# Altium PCB Portable power supply version2.PcbDoc
Units mm, origin at the board's own origin, x right, y up, seen from the top; angles counter-clockwise.
Board outline 83.82 x 73.66 mm, 4 copper layers (Top Layer, GND, PWR, Bottom Layer), stack 0.603 mm thick; 87 components, 84 nets, 337 pads, 153 vias.
Unrouted connection lines stored in the file: 2.
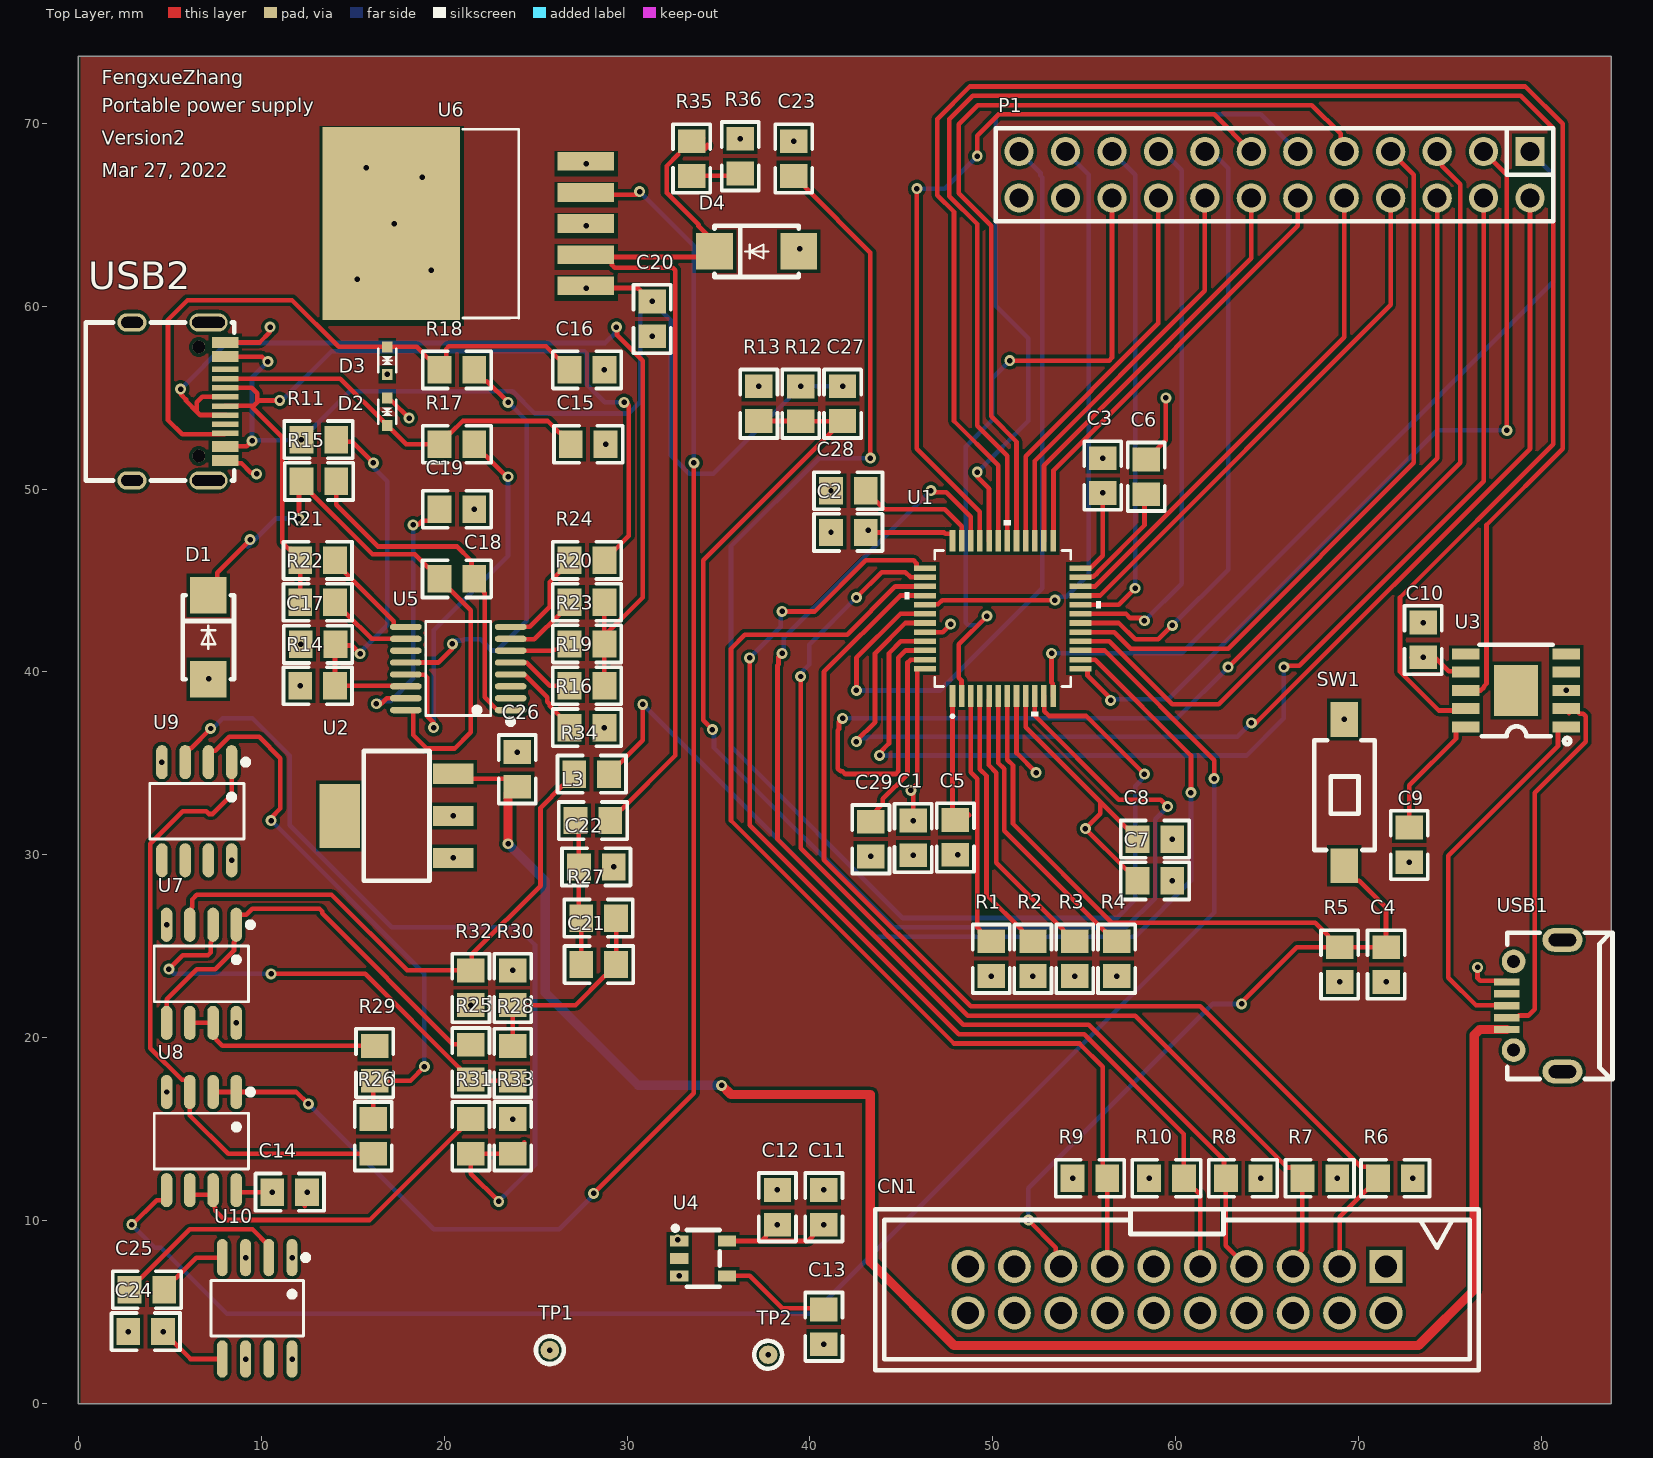
[diagram p0: Top Layer view]
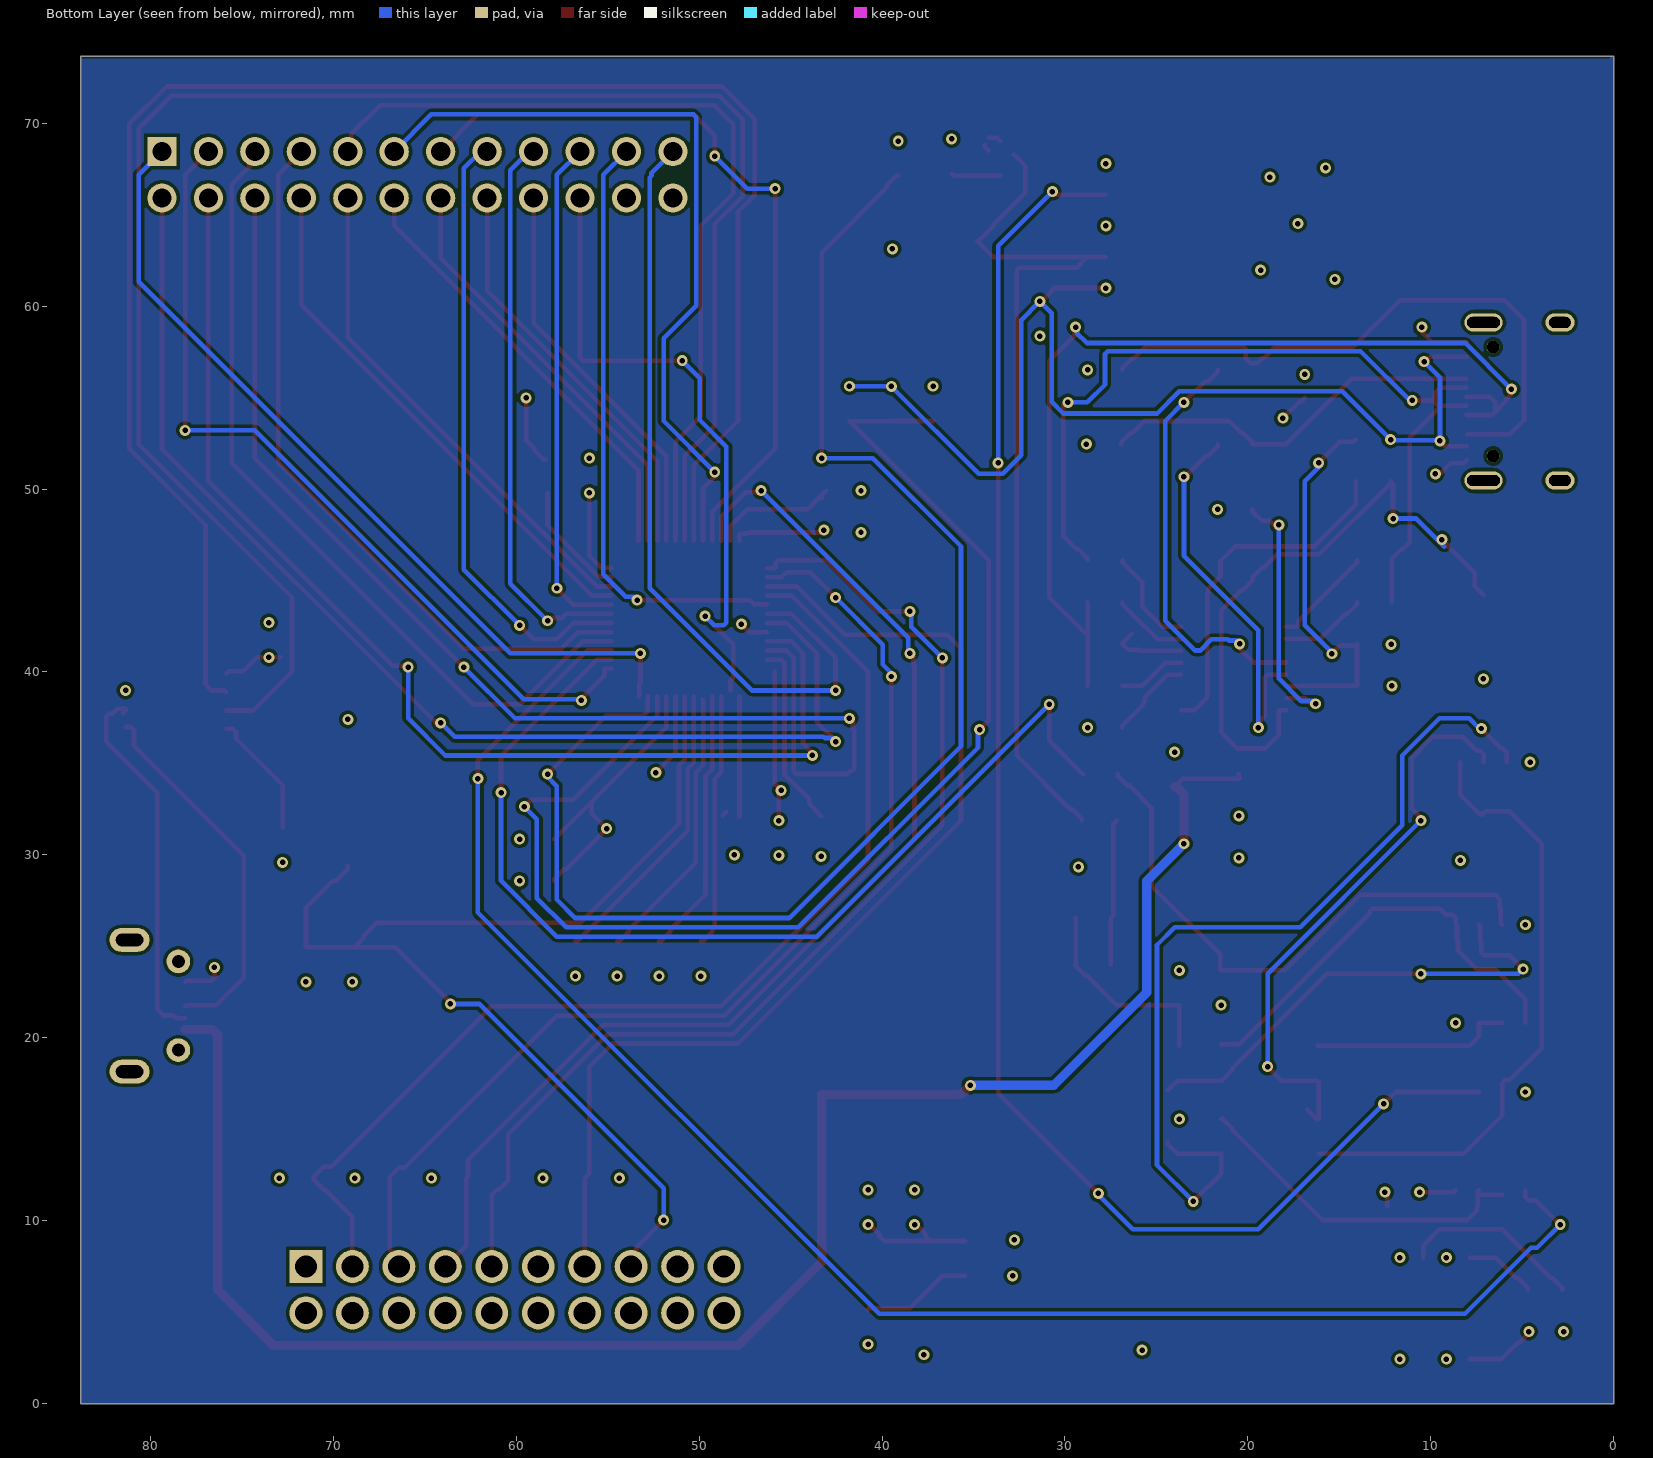
[diagram p1: Bottom Layer view, seen from below]
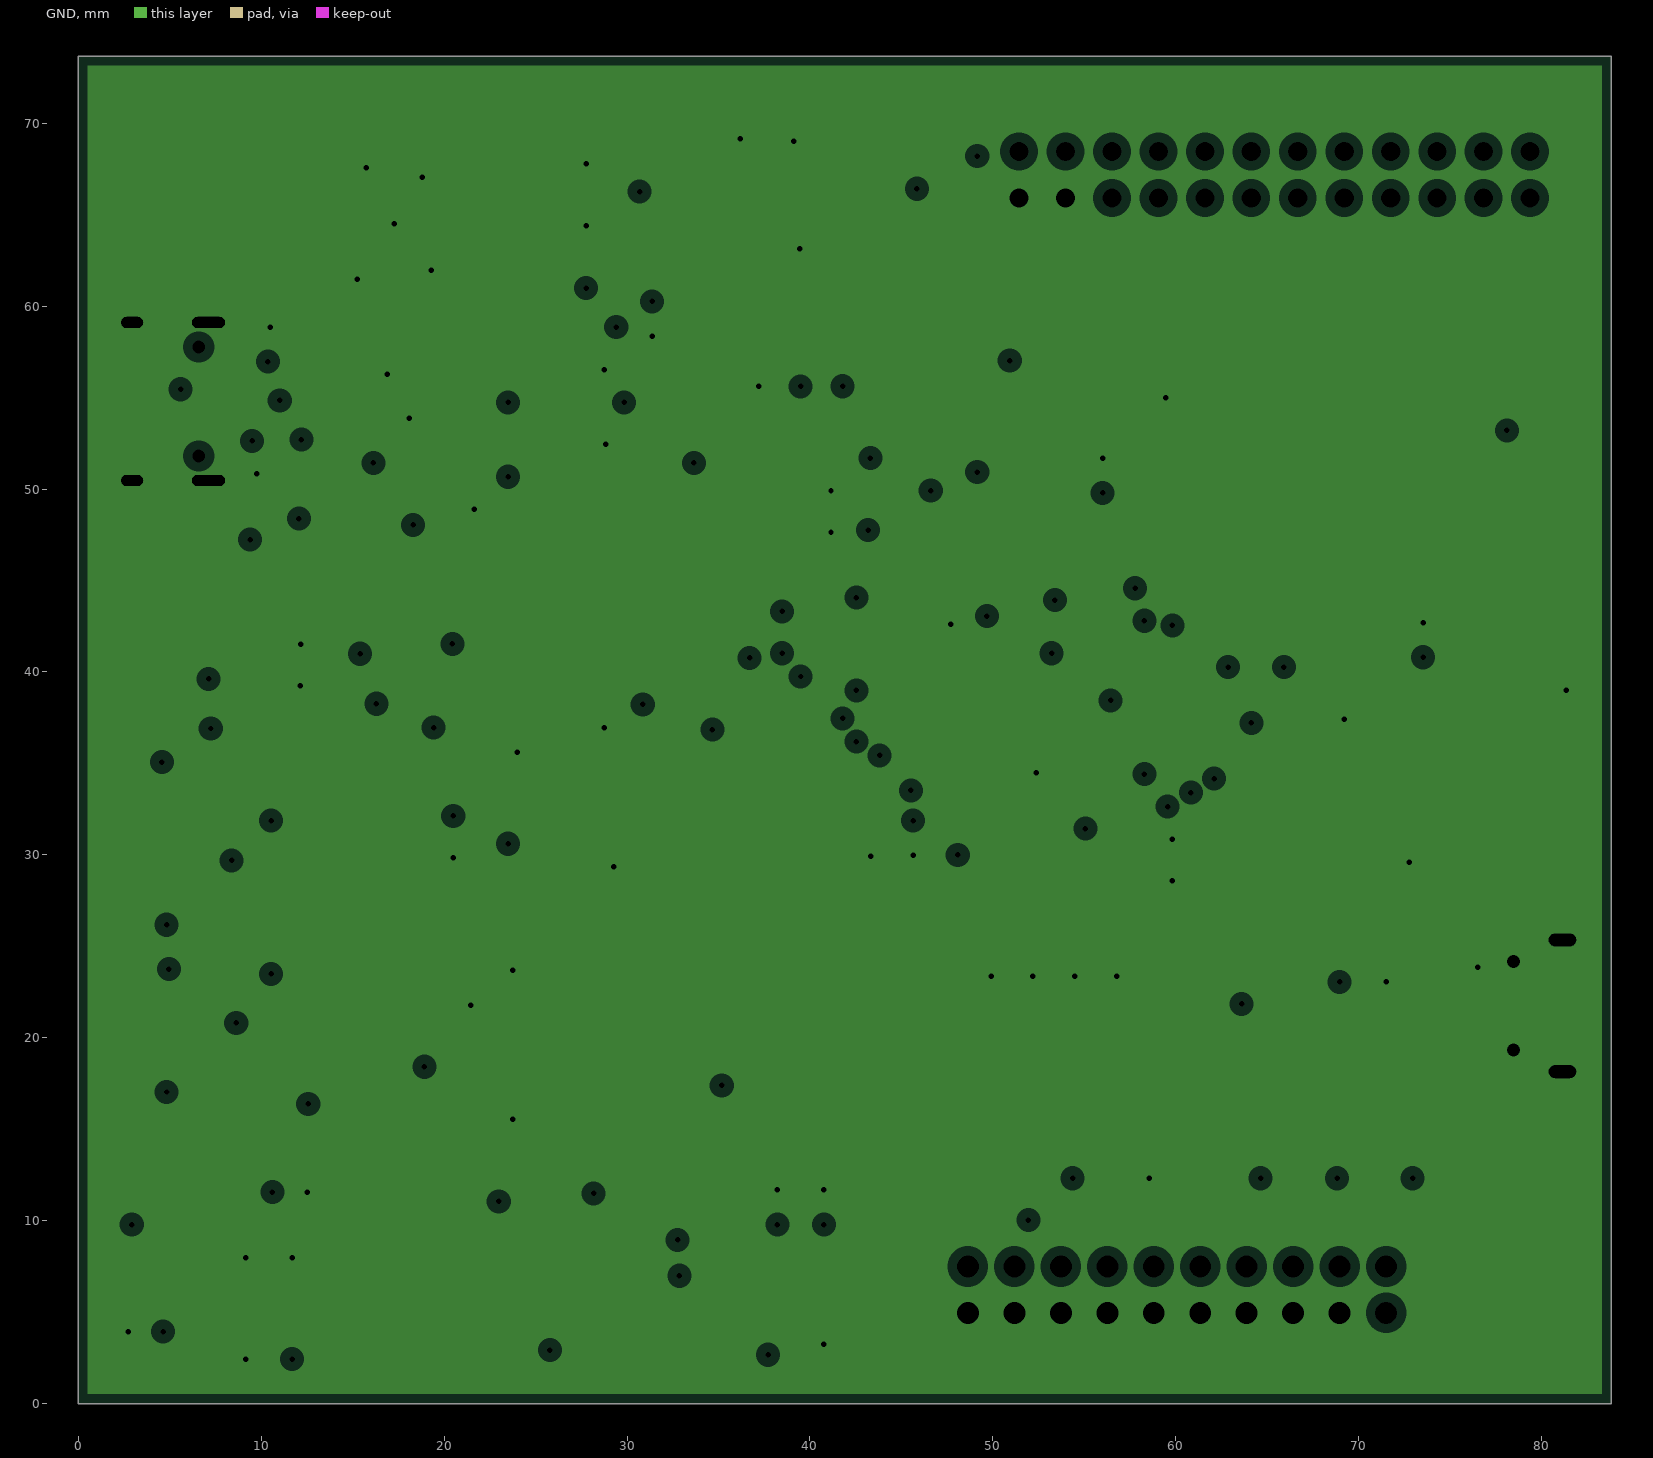
[diagram p2: GND, clearances drawn from the general rule]
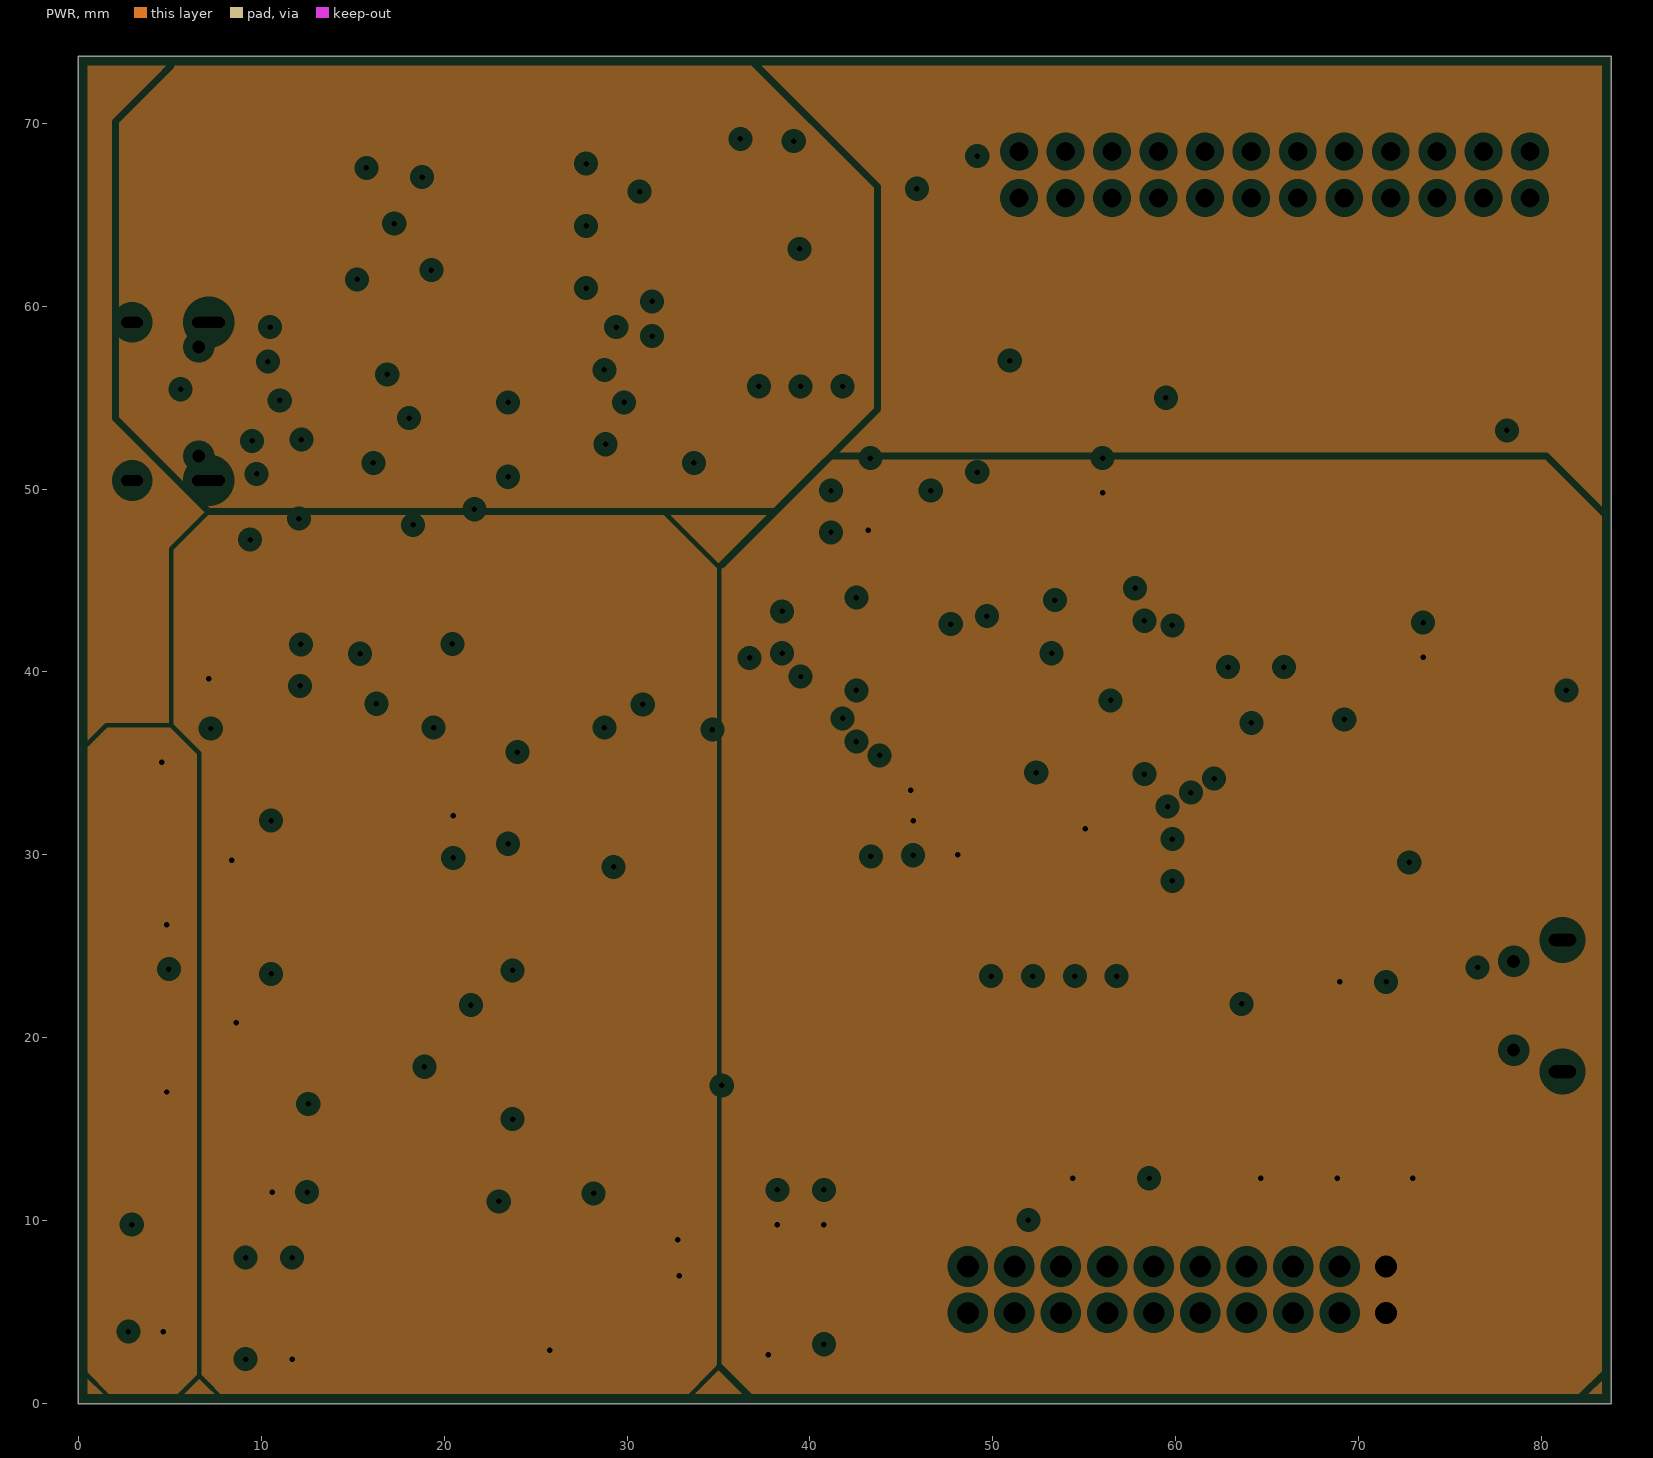
[diagram p3: PWR, clearances drawn from the general rule]
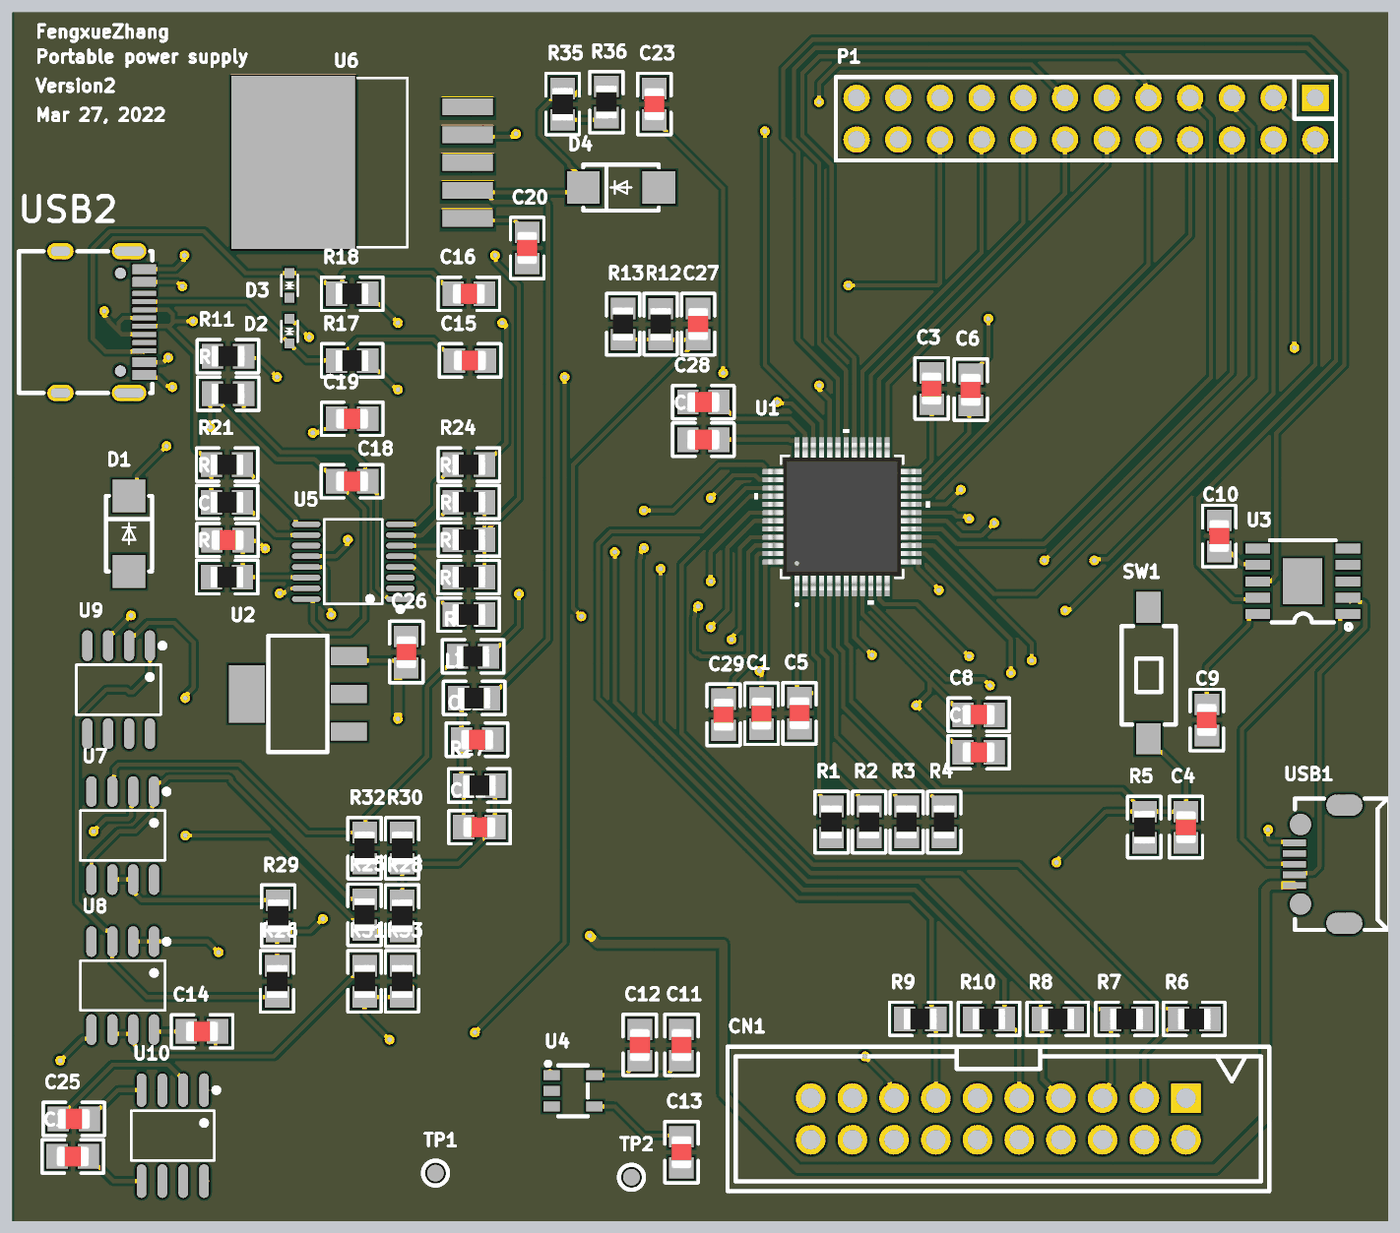
[diagram p4: 3D render of the assembled board from above, using the file's embedded part models]

## Layer stack, top to bottom
Top Solder: solder mask 0.0102, Solder Resist, Dk 3.5
Top Layer: signal copper 0.0356
Dielectric 2: core 0.0711, FR-4, Dk 4.1
GND: plane copper 0.035, net GND
Dielectric 1: prepreg 0.32, FR-4, Dk 4.8
PWR: plane copper 0.035, net (Multiple Nets)
Dielectric 3: core 0.0711, FR-4, Dk 4.1
Bottom Layer: signal copper 0.0356
Bottom Solder: solder mask 0.0102, Solder Resist, Dk 3.5

## Board outline
0,0 0,73.66 83.82,73.66 83.82,0

## Design rules (kind name [scope] priority, off if disabled: settings)
Clearance [All] p1: gap=0.178 ignorepadtopadclearanceinfootprint=FALSE
PlaneClearance [All] p1: clearance=0.508
PlaneConnect [All] p1: planeconnectstyle=Relief reliefexpansion=0.508 reliefentries=4 reliefconductorwidth=0.254 reliefairgap=0.254
PolygonConnect [All] p1: connectstyle=Relief reliefconductorwidth=0.254 reliefentries=4 polygonreliefangle="90 Angle" airgapwidth=0.254
RoutingVias [All] p1: holewidth=0.3 width=0.6 viastyle="Through Hole" minholewidth=0.3 minwidth=0.6 maxholewidth=0.711 maxwidth=1.27
SolderMaskExpansion [All] p1: expansion=0.102 istentingtop=FALSE
Width Width_power [InNet('VBUSmin')] p1: maxlimit=0.508 minlimit=0.254 preferedwidth=0.508
Width [All] p2: maxlimit=0.254 minlimit=0.254 preferedwidth=0.254
28 further rules are at their usual default settings.

## Classes and differential pairs
component class VoltageRegulator: C20 C21 C22 C23 C24 C25 D4 L3 R25 R26 R27 R28 R29 R30 R31 R32 R33 R34 R35 R36 U6 U7 U8 U9 U10
component class Front(LDR): C15 C16 C17 C18 C19 C27 D1 D2 D3 R11 R12 R13 R14 R15 R16 R17 R18 R19 R20 R21 R22 R23 R24 U5 USB2
component class Control: C1 C2 C3 C4 C5 C6 C7 C8 C9 C10 C11 C12 C13 C14 C26 C28 C29 CN1 P1 R1 R2 R3 R4 R5 R6 R7 R8 R9 R10 SW1 TP1 TP2 U1 U2 U3 U4 USB1

## Components (designator, comment, footprint, x,y, rotation, side; value= is the part's Value field where it differs from the comment)
C1 "0.1uF" 0805C 45.644,30.927 r270 top
C2 "0.1uF" 0805C 42.103,47.625 r180 top
C3 "0.1uF" 0805C 56.007,50.739 r90 top
C4 "100nF" 0805C 71.501,24.003 r90 top
C5 "0.1uF" 0805C 47.955,30.952 r270 top
C6 "2.2nF" 0805C 58.395,50.663 r90 top
C7 "0.1uF" 0805C 58.867,28.575 r0 top
C8 "0.1uF" 0805C 58.867,30.861 r0 top
C9 "0.1uF" 0805C 72.771,30.541 r270 top
C10 "0.1uF" 0805C 73.528,41.752 r270 top
C11 "0.1uF" 0805C 40.767,10.729 r90 top
C12 "10uF" 0805C 38.227,10.729 r90 top
C13 "10nF" 0805C 40.767,4.191 r90 top
C14 "10uF" 0805C 11.557,11.557 r0 top
C15 "220pF" 0805C 27.879,52.451 r0 top
C16 "220pF" 0805C 27.813,56.515 r0 top
C17 "0.1uF" 0805C 13.117,41.504 r180 top
C18 "10uF" 0805C 20.701,45.085 r180 top
C19 "1nF" 0805C 20.701,48.895 r0 top
C20 "330uF" 0805C 31.369,59.309 r270 top
C21 "5.6nF" 0805C 28.453,24.003 r0 top
C22 "680uF" 0805C 28.321,29.337 r180 top
C23 "0.1uF" 0805C 39.116,68.072 r90 top
C24 "10uF" 0805C 3.683,3.937 r0 top
C25 "10uF" 0805C 3.749,6.223 r0 top
C26 "10uF" 0805C 24.003,34.671 r90 top
C27 "5.6nF" 0805C 41.783,54.671 r270 top
C28 "2.2nF" 0805C 42.103,49.911 r180 top
C29 "2.2nF" 0805C 43.332,30.861 r270 top
CN1 "300S-20P" CONN-TH_300S-20P 60.071,6.223 r180 top
D1 "SS34_C8678" DO-214AC_L4.3-W2.7-LS5.3-RD 7.112,41.896 r270 top
D2 "PESD3V3S1BA-N" SOD-523_L1.2-W0.8-LS1.6-BI 16.891,54.229 r270 top
D3 "PESD3V3S1BA-N" SOD-523_L1.2-W0.8-LS1.6-BI 16.891,57.023 r90 top
D4 "SS34_C8678" DO-214AC_L4.3-W2.7-LS5.3-RD 37.084,62.992 r0 top
L3 "33uA" 0805 28.133,31.877 r0 top
P1 "Female header2*12PRight Angle/pitch2.54mm" HDR-TH_24P-P2.54-V-F-R2-C12-S2.54 65.405,67.183 r180 top
R1 "10K" 0805 49.911,24.323 r270 top
R2 "10K" 0805 52.197,24.323 r270 top
R3 "10K" 0805 54.483,24.323 r270 top
R4 "10K" 0805 56.769,24.323 r270 top
R5 "10K" 0805 68.961,24.003 r90 top
R6 "10K" 0805 72.009,12.319 r180 top
R7 "10K" 0805 67.879,12.319 r180 top
R8 "10K" 0805 63.693,12.319 r180 top
R9 "10K" 0805 55.311,12.319 r0 top
R10 "10K" 0805 59.497,12.319 r0 top
R11 "47k" 0805 13.147,52.705 r180 top
R12 "5.1K" 0805 39.497,54.658 r90 top
R13 "1K" 0805 37.211,54.671 r270 top
R14 "4.7k" 0805 13.081,39.243 r0 top
R15 "10K" 0805 13.147,50.419 r0 top
R16 "10K" 0805 27.813,36.957 r180 top
R17 "100" 0805 20.701,52.451 r0 top
R18 "100" 0805 20.701,56.515 r0 top
R19 "1K" 0805 27.813,39.243 r180 top
R20 "13K" 0805 27.813,43.815 r180 top
R21 "13K" 0805 13.081,46.101 r0 top
R22 "1K" 0805 13.081,43.815 r0 top
R23 "2k" 0805 27.813,41.529 r0 top
R24 "2k" 0805 27.813,46.101 r0 top
R25 "1K" 0805 21.463,18.669 r270 top
R26 "2k" 0805 16.129,14.605 r90 top
R27 "12k" 0805 28.453,26.543 r180 top
R28 "1K" 0805 23.749,18.603 r90 top
R29 "2k" 0805 16.198,18.603 r90 top
R30 "2k" 0805 23.749,22.733 r270 top
R31 "5.1K" 0805 21.463,14.605 r90 top
R32 "5.1K" 0805 21.463,22.733 r270 top
R33 "5.1K" 0805 23.749,14.605 r90 top
R34 "5.1K" 0805 28.067,34.417 r0 top
R35 "47k" 0805 33.528,68.072 r90 top
R36 "4.7k" 0805 36.195,68.199 r270 top
SW1 "TS-1101-C-W" SW-SMD_L6.0-W3.3-LS8.0 69.215,33.401 r90 top
TP1 "INPUT" Testpoin 25.781,2.921 r0 top value=Input
TP2 "INPUT" Testpoin 37.719,2.667 r90 top value=Input
U1 "STM32F334C6T6" LQFP48-7x7mm 50.546,42.926 r90 top
U2 "AMS1117-5.0_C347223" SOT-223_L6.7-W3.5-P2.30-BR 17.399,32.131 r0 top
U3 "CH340K" ESOP-10_L4.9-W3.9-P1.00-LS6.2-BL-EP 78.613,38.989 r90 top
U4 "LP2992IM5-3.3/NOPB" SOT-23-5_L3.0-W1.7-P0.95-LS2.8-BR 34.163,7.935 r180 top
U5 "LDR6321" SSOP-16_L5.0-W4.4-P0.65-LS6.4-BL 23.639,37.913 r90 top
U6 "LM2596S-ADJ" TO-263-5_L10.2-W8.9-P1.70-BR 22.428,64.516 r0 top
U7 "LMV358-SR" SOP-8_L4.9-W3.9-P1.27-LS6.0-BL 6.731,23.495 r180 top
U8 "LMV358-SR" SOP-8_L4.9-W3.9-P1.27-LS6.0-BL 6.731,14.351 r180 top
U9 "LMV358-SR" SOP-8_L4.9-W3.9-P1.27-LS6.0-BL 6.477,32.385 r180 top
U10 "TP7660H_C2833525" SOIC-8_L4.9-W3.9-P1.27-LS6.0-BL 9.779,5.207 r180 top
USB1 "MICROXNJ" MICRO-USB-SMD_MICROXNJ 79.626,21.747 r90 top
USB2 "TYPEC-304-BCP16" USB-C-SMD_TYPEC-304-BCP16 5.486,54.788 r270 top

## Footprints (in the part's own frame and the unit in brackets; to place one, negate y for a bottom-side part, rotate by r counter-clockwise, add the part's x,y. Pads: shape width x height; smd on the part's side, far side on the other; paste and mask are expansions set on the pad)
0805 [mm]
  rect 1.3x1.5 smd: 1(-0.95,0) 2(0.95,0)
  silkscreen extent -1.87,-1.02 1.88,1.02, body extent -1,-0.63 1,0.62, height 0.5
0805C [mm]
  rect 1.3x1.5 smd: 1(-0.95,0) 2(0.95,0)
  silkscreen extent -1.87,-1.02 1.88,1.02, body extent -1,-0.62 1,0.63, height 0.78
CONN-TH_300S-20P [mm]
  rect 1.8x1.8 hole 1.2: 1(-11.43,-1.27)
  round 1.8 hole 1.2: 2(-11.43,1.27) 3(-8.89,-1.27) 4(-8.89,1.27) 5(-6.35,-1.27) 6(-6.35,1.27) 7(-3.81,-1.27) 8(-3.81,1.27) 9(-1.27,-1.27) 10(-1.27,1.27) 11(1.27,-1.27) 12(1.27,1.27) 13(3.81,-1.27) 14(3.81,1.27) 15(6.35,-1.27) 16(6.35,1.27) 17(8.89,-1.27) 18(8.89,1.27) 19(11.43,-1.27) 20(11.43,1.27)
  silkscreen extent -16.5,-4.4 16.5,4.4
DO-214AC_L4.3-W2.7-LS5.3-RD [mm]
  rect 2x2 smd: 1(-2.3,0) 2(2.3,0)
  silkscreen extent -2.3,-1.4 2.3,1.4
ESOP-10_L4.9-W3.9-P1.00-LS6.2-BL-EP [mm]
  rect 0.6x1.5 smd: 1(-2,-2.75) 2(-1,-2.75) 3(0,-2.75) 4(1,-2.75) 5(2,-2.75) 6(2,2.75) 7(1,2.75) 8(0,2.75) 9(-1,2.75) 10(-2,2.75)
  rect 2.8x2.4 smd: 11(0,0)
  silkscreen extent -2.94,-2.96 2.5,2
HDR-TH_24P-P2.54-V-F-R2-C12-S2.54 [mm]
  rect 1.6x1.6 hole 1.05: 1(-13.97,-1.27)
  round 1.6 hole 1.05: 2(-13.97,1.27) 3(-11.43,-1.27) 4(-11.43,1.27) 5(-8.89,-1.27) 6(-8.89,1.27) 7(-6.35,-1.27) 8(-6.35,1.27) 9(-3.81,-1.27) 10(-3.81,1.27) 11(-1.27,-1.27) 12(-1.27,1.27) 13(1.27,-1.27) 14(1.27,1.27) 15(3.81,-1.27) 16(3.81,1.27) 17(6.35,-1.27) 18(6.35,1.27) 19(8.89,-1.27) 20(8.89,1.27) 21(11.43,-1.27) 22(11.43,1.27) 23(13.97,-1.27) 24(13.97,1.27)
  silkscreen extent -15.24,-2.54 15.24,2.54
LQFP48-7x7mm [mm]
  rect 1.194x0.305 smd paste+0 mask+0: 1(-4.25,2.75) 2(-4.25,2.25) 3(-4.25,1.75) 4(-4.25,1.25) 5(-4.25,0.75) 6(-4.25,0.25) 7(-4.25,-0.25) 8(-4.25,-0.75) 9(-4.25,-1.25) 10(-4.25,-1.75) 11(-4.25,-2.25) 12(-4.25,-2.75) 25(4.25,-2.75) 26(4.25,-2.25) 27(4.25,-1.75) 28(4.25,-1.25) 29(4.25,-0.75) 30(4.25,-0.25) 31(4.25,0.25) 32(4.25,0.75) 33(4.25,1.25) 34(4.25,1.75) 35(4.25,2.25) 36(4.25,2.75)
  rect 0.305x1.194 smd paste+0 mask+0: 13(-2.75,-4.25) 14(-2.25,-4.25) 15(-1.75,-4.25) 16(-1.25,-4.25) 17(-0.75,-4.25) 18(-0.25,-4.25) 19(0.25,-4.25) 20(0.75,-4.25) 21(1.25,-4.25) 22(1.75,-4.25) 23(2.25,-4.25) 24(2.75,-4.25) 37(2.75,4.25) 38(2.25,4.25) 39(1.75,4.25) 40(1.25,4.25) 41(0.75,4.25) 42(0.25,4.25) 43(-0.25,4.25) 44(-0.75,4.25) 45(-1.25,4.25) 46(-1.75,4.25) 47(-2.25,4.25) 48(-2.75,4.25)
  silkscreen extent -5.43,-5.35 5.35,5.35, body extent -4.5,-4.5 4.5,4.5, height 1.6
MICRO-USB-SMD_MICROXNJ [mm]
  rect 0.4x1.4 smd: 1(-1.3,1.521) 2(-0.65,1.521) 3(0,1.521) 4(0.65,1.521) 5(1.3,1.521)
  round 1.3 hole 0.7: 6(2.425,1.149) 9(-2.425,1.149)
  oval 1.3x2.2 hole 0.7 slot 1.5 at 90 deg: 7(3.6,-1.521) 8(-3.6,-1.521)
  silkscreen extent -4,-4.26 4,1.49
SOD-523_L1.2-W0.8-LS1.6-BI [mm]
  rect 0.6x0.6 smd: 1(-0.75,0) 2(0.75,0)
  silkscreen extent -0.65,-0.5 0.65,0.5
SOIC-8_L4.9-W3.9-P1.27-LS6.0-BL [mm]
  oval 0.588x2.045 smd: 1(-1.905,-2.773) 2(-0.635,-2.773) 3(0.635,-2.773) 4(1.905,-2.773) 5(1.905,2.773) 6(0.635,2.773) 7(-0.635,2.773) 8(-1.905,2.773)
  silkscreen extent -2.8,-2.92 2.53,1.52
SOP-8_L4.9-W3.9-P1.27-LS6.0-BL [mm]
  oval 0.63x1.865 smd: 1(-1.905,-2.682) 2(-0.635,-2.682) 3(0.635,-2.682) 4(1.905,-2.682) 5(1.905,2.682) 6(0.635,2.682) 7(-0.635,2.682) 8(-1.905,2.682)
  silkscreen extent -2.82,-2.83 2.58,1.52
SOT-23-5_L3.0-W1.7-P0.95-LS2.8-BR [mm]
  rect 1x0.6 smd: 1(1.3,-0.95) 2(1.3,0) 3(1.3,0.95) 4(-1.3,0.95) 5(-1.3,-0.95)
  silkscreen extent -0.9,-1.78 1.65,1.55
SOT-223_L6.7-W3.5-P2.30-BR [mm]
  rect 2.2x1.1 smd: 1(3.099,-2.3) 2(3.099,0) 3(3.099,2.3)
  rect 2.2x3.5 smd: 4(-3.099,0)
  silkscreen extent -1.8,-3.55 1.8,3.55
SSOP-16_L5.0-W4.4-P0.65-LS6.4-BL [mm]
  oval 0.343x1.731 smd: 1(0,0) 2(0.65,0) 3(1.3,0) 4(1.95,0) 5(2.6,0) 6(3.25,0) 7(3.9,0) 8(4.55,0) 9(4.55,5.732) 10(3.9,5.732) 11(3.25,5.732) 12(2.6,5.732) 13(1.95,5.732) 14(1.3,5.732) 15(0.65,5.732) 16(0,5.732)
  silkscreen extent -0.77,-0.15 4.85,4.64
SW-SMD_L6.0-W3.3-LS8.0 [mm]
  rect 1.9x1.5 smd: 1(-4,0) 2(4,0)
  silkscreen extent -3.14,-1.67 2.86,1.63
Testpoin [mil] "Testpoint"
  round 40 smd: 1(0,0)
  silkscreen extent -30,-30 30,30
TO-263-5_L10.2-W8.9-P1.70-BR [mm]
  rect 3.083x1.02 smd: 1(5.31,-3.4) 2(5.31,-1.7) 3(5.31,0) 4(5.31,1.7) 5(5.31,3.4)
  rect 7.521x10.566 smd: 6(-5.31,0)
  silkscreen extent -1.4,-5.16 1.65,5.16
USB-C-SMD_TYPEC-304-BCP16 [mm]
  oval 1x2.1 hole 0.6 slot 1.8 at 90 deg: 13(-4.32,1.633) 14(4.32,1.633)
  oval 1x1.6 hole 0.6 slot 1.2 at 90 deg: 15(-4.32,-2.547) 16(4.32,-2.547)
  rect 0.6x1.45 smd: A1B12(-3.225,2.547) A4B9(-2.45,2.547) B1A12(3.22,2.547) B4A9(2.45,2.547)
  rect 0.3x1.45 smd: A5(-1.25,2.547) A6(-0.25,2.547) A7(0.25,2.547) A8(1.25,2.547) B5(1.75,2.547) B6(0.75,2.547) B7(-0.75,2.547) B8(-1.75,2.547)
  round 0.7 hole 0.7 unplated: ""(-2.98,1.102) ""(2.98,1.102)
  silkscreen extent -4.32,-5.08 4.32,3.05

## Part data
C1 C2 C3 C5 C7 C8 C9 C10 C11 C17 C23: library part C_0.1uf, "Capacitor", Reviewed by="RM - 2018/08/05", Revision="July-2002: Re-released for DXP Platform."
C4: library part C_100nf, "Capacitor", Reviewed by="RM - 2018/08/05", Revision="July-2002: Re-released for DXP Platform."
C6 C28 C29: library part C_2.2nF, "Capacitor", Reviewed by="RM - 2018/08/05", Revision="July-2002: Re-released for DXP Platform."
C12 C14 C18 C24 C25 C26: library part C_10uf, "Capacitor", Reviewed by="RM - 2018/08/05", Revision="July-2002: Re-released for DXP Platform."
C13: library part C_10nF, "Capacitor", Reviewed by="RM - 2018/08/05", Revision="July-2002: Re-released for DXP Platform."
C15 C16: library part C_220pF, "Capacitor", Reviewed by="RM - 2018/08/05", Revision="July-2002: Re-released for DXP Platform."
C19: library part C_1nf, "Capacitor", Reviewed by="RM - 2018/08/05", Revision="July-2002: Re-released for DXP Platform."
C20: library part C_330uf, "Capacitor", Reviewed by="RM - 2018/08/05", Revision="July-2002: Re-released for DXP Platform."
C21 C27: library part C_5.6nf, "Capacitor", Reviewed by="RM - 2018/08/05", Revision="July-2002: Re-released for DXP Platform."
C22: library part C_680uf, "Capacitor", Reviewed by="RM - 2018/08/05", Revision="July-2002: Re-released for DXP Platform."
CN1: BOM_JLCPCB Part Class="Extended Part", BOM_Manufacturer="Shenzhen Cankemeng", BOM_Manufacturer Part=-, BOM_Supplier=LCSC, BOM_Supplier Part=C132442, Contributor=LCSC, spicePre=C, spiceSymbolName=300S-20P
D1 D4: BOM_JLCPCB Part Class="Basic Part", BOM_Manufacturer=MDD, BOM_Manufacturer Part=SS34, BOM_Supplier=LCSC, BOM_Supplier Part=C8678, spicePre=D, spiceSymbolName=SS34_C8678
D2 D3: "TVS3V3", BOM_JLCPCB Part Class="Extended Part", BOM_Manufacturer="Bourne Semicon (Shenzhen)", BOM_Manufacturer Part=PESD3V3S1BA-N, BOM_Supplier=LCSC, BOM_Supplier Part=C316037, Contributor=LCSC, spicePre=D, spiceSymbolName=PESD3V3S1BA-N
L3: library part I_33uA, "Inductor", Reviewed by="RM - 2018/08/05"
P1: BOM_JLCPCB Part Class="Extended Part", BOM_Manufacturer=BOOMELE, BOM_Manufacturer Part="Female header2*12PRight Angle/pitch2.54mm", BOM_Supplier=LCSC, BOM_Supplier Part=C62744, spicePre=P, spiceSymbolName="Female header2*12PRight Angle/pitch2.54mm"
R1 R2 R3 R4 R5 R6 R7 R8 R9 R10 R15 R16: library part R_10k, "Resistor", Reviewed by="RM - 2018/08/05"
R11 R35: library part R_47k, "Resistor", Reviewed by="RM - 2018/08/05"
R12 R31 R32 R33 R34: library part R_5.1k, "Resistor", Reviewed by="RM - 2018/08/05"
R13 R19 R22 R25 R28: library part R_1k, "Resistor", Reviewed by="RM - 2018/08/05"
R14 R36: library part R_4.7k, "Resistor", Reviewed by="RM - 2018/08/05"
R17 R18: library part R_100, "Resistor", Reviewed by="RM - 2018/08/05"
R20 R21: library part R_13k, "Resistor", Reviewed by="RM - 2018/08/05"
R23 R24 R26 R29 R30: library part R_2k, "Resistor", Reviewed by="RM - 2018/08/05"
R27: library part R_12k, "Resistor", Reviewed by="RM - 2018/08/05"
SW1: BOM_JLCPCB Part Class="Extended Part", BOM_Manufacturer="XKB Connectivity(中国星坤)", BOM_Manufacturer Part=TS-1101-C-W, BOM_Supplier=LCSC, BOM_Supplier Part=C318938, Contributor=LCSC, spicePre=S, spiceSymbolName=TS-1101-C-W
TP1 TP2: library part "Test Point", "Pad"
U1: "No Description Available", Mfr_Name=STMicroelectronics, Copyright="Copyright (C) 2021 Ultra Librarian. All rights reserved.", Manufacturer_Part_Number=STM32F334C6T6, RefDes=RefDes, Type=DEV
U2: BOM_JLCPCB Part Class="Extended Part", BOM_Manufacturer="Youtai Semiconductor Co., Ltd.", BOM_Manufacturer Part=AMS1117-5.0, BOM_Supplier=LCSC, BOM_Supplier Part=C347223, Contributor=LCSC, spicePre=U, spiceSymbolName=AMS1117-5.0_C347223
U3: BOM_JLCPCB Part Class="Extended Part", BOM_Manufacturer="WCH(Jiangsu Qin Heng)", BOM_Manufacturer Part=CH340K, BOM_Supplier=LCSC, BOM_Supplier Part=C968586, Contributor=LCSC, spicePre=U, spiceSymbolName=CH340K
U4: BOM_JLCPCB Part Class="Extended Part", BOM_Manufacturer=TI, BOM_Manufacturer Part=LP2992IM5-3.3/NOPB, BOM_Supplier=LCSC, BOM_Supplier Part=C129353, Contributor=LCSC, spicePre=U, spiceSymbolName=LP2992IM5-3.3/NOPB
U5: BOM_JLCPCB Part Class="Extended Part", BOM_Manufacturer=Legendary(乐得瑞), BOM_Manufacturer Part=LDR6321, BOM_Supplier=LCSC, BOM_Supplier Part=C2919632, Contributor=LCSC, spicePre=U, spiceSymbolName=LDR6321
U6: BOM_JLCPCB Part Class="Extended Part", BOM_Manufacturer="UMW(Youtai Semiconductor Co., Ltd.)", BOM_Manufacturer Part=LM2596S-ADJ, BOM_Supplier=LCSC, BOM_Supplier Part=C347423, Contributor=LCSC, spicePre=U, spiceSymbolName=LM2596S-ADJ
U7 U8 U9: BOM_JLCPCB Part Class="Extended Part", BOM_Manufacturer=Gainsil, BOM_Manufacturer Part=LMV358-SR, BOM_Supplier=LCSC, BOM_Supplier Part=C362274, spicePre=U, spiceSymbolName=LMV358-SR, subpart_no=2
U10: BOM_JLCPCB Part Class="Extended Part", BOM_Manufacturer=TOPPOWER(南京拓微), BOM_Manufacturer Part=TP7660H, BOM_Supplier=LCSC, BOM_Supplier Part=C2833525, Contributor=LCSC, spicePre=U, spiceSymbolName=TP7660H_C2833525
USB1: BOM_JLCPCB Part Class="Extended Part", BOM_Manufacturer="SHOU HAN", BOM_Manufacturer Part=MicroXNJ, BOM_Supplier=LCSC, BOM_Supplier Part=C404969, Contributor=LCSC, spicePre=U, spiceSymbolName=MICROXNJ
USB2: BOM_JLCPCB Part Class="Extended Part", BOM_Manufacturer=XUNPU, BOM_Manufacturer Part=TYPEC-304-BCP16, BOM_Supplier=LCSC, BOM_Supplier Part=C720629, Contributor=LCSC, spicePre=U, spiceSymbolName=TYPEC-304-BCP16

## Via types
v1: diameter 0.6, hole 0.3, Top Layer to Bottom Layer, 153 vias

## Nets (pads, with @x,y where several pads share a name; then routed paths per layer and width w, separated by ;. In a path a pad name is that pad's centre, name@x,y a point inside that pad or via, vN(x,y) a via of type N, cw(c..) or ccw(c..) an arc to the next point about the centre after c; other vN are vias at no path point)
+3V3: C1.1 C2.1 C3.1 C5.2 C7.1 C8.1 C10.2 C11.1 C12.1 CN1.1 CN1.2 R5.1 R6.1 R7.1 R8.1 R9.1 TP2.1 U1.9 U1.24 U1.36 U1.48 U3.7 U4.5 | length 45
  Top Layer w0.254: U4.5 37.333,8.885 ; v1(38.227,9.779) 38.127,9.779 37.604,9.256 37.604,9.156 37.333,8.885 ; v1(40.767,9.779) 40.667,9.779 40.144,9.256 40.144,9.156 39.873,8.885 37.333,8.885 ; C2.1 47.347,47.625 47.411,47.561 47.771,47.561 47.796,47.535 U1.36 ; v1(45.517,33.528) 45.872,33.884 U1.48@45.872,40.039 ; v1(45.644,31.877) v1@45.644,33.528 ; U1.9 51.796,36.982 55.88,32.898 ; U1.24 54.821,45.701 55.353,45.701 56.007,46.355 v1(56.007,49.789) ; C7.1 57.917,28.675 57.394,29.198 57.294,29.198 v1(55.057,31.435) 55.88,32.258 55.88,32.898 ; C8.1 55.88,32.898 ; C10.2@72.895,40.802 v1(73.528,40.802) 74.16,40.802 74.925,40.037 75.715,40.037 U3.7@75.86,39.892
  other v1: 37.719,2.667 54.361,12.319 64.643,12.319 68.829,12.319 72.959,12.319 68.961,23.053 48.082,29.997 43.18,47.752
+5V: C14.1 D1.2 TP1.1 U2.2 U4.1 U4.3 U7.8 U8.8 U9.8 U10.8 | length 2
  Top Layer w0.254: U8.8 8.748,11.557 v1(10.607,11.557)
  other v1: 11.684,2.434 25.781,2.921 32.863,6.985 32.766,8.951 8.636,20.813 8.382,29.703 20.498,32.131 7.123,39.615
-5V: C24.2 U7.4 U8.4 U9.4 U10.5 | length 3.9
  Top Layer w0.254: v1(4.633,3.937) 4.633,3.837 5.156,3.314 5.256,3.314 6.136,2.434 U10.5
  other v1: 4.826,17.033 4.826,26.177 4.572,35.067
ADC_D-: R21.2 U5.9 | length 5.6
  Top Layer w0.254: R21.2 14.031,46.001 17.254,42.778 17.254,42.504 17.295,42.463 U5.9
CC1: C15.1 D2.2 R17.1 USB2.A5 | length 21.5
  Top Layer w0.254: USB2.A5@8.055,56.039 14.331,56.039 D2.2 17.919,52.451 R17.1 19.751,52.551 20.274,53.074 20.374,53.074 21.021,53.721 25.659,53.721 26.306,53.074 26.406,53.074 26.929,52.551 C15.1
CC2: C16.1 D3.2 R18.1 USB2.B5 | length 34
  Top Layer w0.254: USB2.B5@8.008,52.987 7.754,52.987 5.687,52.987 4.902,53.772 4.902,59.258 5.969,60.325 11.684,60.325 14.236,57.773 D3.2 18.493,57.773 19.128,57.138 19.228,57.138 19.49,56.877 19.849,56.877 20.11,57.138 20.11,57.659 20.259,57.807 25.571,57.807 26.24,57.138 26.34,57.138 26.863,56.615 C16.1
D+: R19.1 R20.1 R23.2 USB2.A6 USB2.B6 | length 53.7
  Top Layer w0.254: v1(5.597,55.458) 5.597,55.183 5.887,54.894 5.887,54.819 6.477,54.229 ; USB2.B6@8.049,54.046 6.66,54.046 6.477,54.229 ; USB2.A6@8.049,55.046 6.786,55.046 6.477,54.737 6.477,54.229 ; R19.1 R23.2@28.763,41.971 ; R20.1 R23.2@28.763,41.971 ; v1(29.413,58.852) 29.45,58.815 29.45,58.434 30.861,57.023 30.861,44.069 R23.2@28.763,41.971
  Bottom Layer w0.254: v1(5.597,55.458) 8.127,57.988 28.813,57.988 29.347,58.522 29.347,58.786 v1(29.413,58.852)
D-: R21.1 R22.1 R24.2 USB2.A7 USB2.B7 | length 49
  Top Layer w0.254: USB2.A7@8.049,54.546 9.588,54.546 ; USB2.B7@8.049,55.546 9.478,55.546 9.779,55.245 9.779,54.844 9.779,54.737 ; v1(11.013,54.844) 9.886,54.844 9.779,54.737 ; R22.1 R21.1 12.131,46.201 11.608,46.724 11.508,46.724 11.151,47.081 11.151,52.837 9.515,54.473 9.779,54.737 ; R24.2 28.763,46.201 29.286,46.724 29.386,46.724 30.099,47.437 30.099,54.588 29.95,54.737 v1(29.845,54.737)
  Bottom Layer w0.254: v1(11.013,54.844) 11.013,54.773 11.049,54.737 13.843,57.531 27.664,57.531 27.813,57.382 27.813,55.702 28.778,54.737 v1(29.845,54.737)
DOWN_D+: R20.2 U5.7 | length 4.1
  Top Layer w0.254: U5.7 23.656,41.796 24.413,41.796 24.426,41.783 24.931,41.783 26.34,43.192 26.863,43.715 R20.2
EN_D+: R19.2 U5.5 | length 3.8
  Top Layer w0.254: U5.5 23.656,40.496 24.528,40.496 25.781,39.243 R19.2
Feedback: U6.4 U8.1 U8.2 | length 86
  Top Layer w0.254: U8.2 U8.1 11.923,17.033 v1(12.573,16.383) ; U6.4@27.765,66.089 30.521,66.089 v1(30.693,66.261) ; v1(28.177,11.49) 33.655,16.968 v1(33.655,51.435)
  Bottom Layer w0.254: v1(12.573,16.383) 19.431,9.525 26.289,9.525 28.177,11.413 v1(28.177,11.49) ; v1(30.693,66.261) 33.655,63.299 v1(33.655,51.435)
GND: C1.2 C2.2 C3.2 C4.1 C6.2 C7.2 C8.2 C9.2 C10.1 C11.2 C12.2 C13.1 C14.2 C15.2 C16.2 C17.2 C19.2 C20.2 C22.1 C23.2 C24.1 C26.2 C28.2 C29.2 CN1.4 CN1.6 CN1.8 CN1.10 CN1.12 CN1.14 CN1.16 CN1.18 CN1.20 D2.1 D3.1 D4.2 P1.22 P1.24 R1.2 R2.2 R3.2 R4.2 R10.1 R13.1 R14.1 R16.1 R30.1 R32.2 R33.2 R36.1 SW1.2 U1.8 U1.44 U2.1 U3.3 U6.3 U6.5 U6.6 U10.1 U10.3 U10.6 USB1.5 USB1.6 USB1.7 USB1.8 USB1.9 USB2.13 USB2.14 USB2.15 USB2.16 USB2.A1B12 USB2.B1A12 | length 19.8
  Top Layer w0.254: USB2.B1A12 8.2,51.402 8.923,51.402 9.433,50.892 9.687,50.892 v1(9.754,50.825) ; USB2.A1B12 9.905,58.013 10.465,58.572 10.465,58.826 v1(10.49,58.852) ; 12.385,10.795 12.385,11.435 v1(12.507,11.557) ; D2.1 17.064,54.806 17.152,54.806 v1(18.085,53.873) ; U1.44 47.256,42.176 v1(47.699,42.619) ; U1.8 51.296,35.572 v1(52.375,34.493) ; C6.2 58.495,51.613 59.018,52.136 59.018,52.236 59.461,52.68 v1(59.461,54.991) ; v1(76.505,23.851) 76.505,23.263 76.654,23.114 78.038,23.114 USB1.5
  other v1: 9.144,2.434 40.767,3.241 2.733,3.937 9.144,7.98 11.684,7.98 38.227,11.679 40.767,11.679 58.547,12.319 23.749,15.555 21.463,21.783 71.501,23.053 49.911,23.373 52.197,23.373 54.483,23.373 56.769,23.373 23.749,23.683 59.817,28.575 29.271,29.337 72.771,29.591 20.498,29.831 43.332,29.911 45.644,29.977 59.817,30.861 24.003,35.621 28.763,36.957 69.215,37.401 81.363,38.989 12.131,39.243 12.167,41.504 73.528,42.702 41.153,47.625 21.651,48.895 41.153,49.911 56.007,51.689 28.829,52.451 37.211,55.621 16.891,56.273 28.763,56.515 31.369,58.359 15.24,61.468 19.304,61.976 39.437,63.133 27.765,64.389 17.272,64.516 18.796,67.056 15.748,67.564 27.765,67.789 39.116,69.022 36.195,69.149
JTCK: CN1.9 R10.2 U1.37 | length 60.1
  Top Layer w0.254: v1(36.703,40.767) 36.703,31.623 48.133,20.193 54.991,20.193 60.447,14.737 R10.2 60.447,12.219 60.97,11.696 61.07,11.696 61.341,11.425 CN1.9 ; v1(38.481,43.307) 40.259,43.307 43.053,46.101 45.677,46.101 45.826,45.952 45.826,45.701 45.852,45.676 U1.37
  Bottom Layer w0.254: v1(36.703,40.767) 38.398,42.462 38.398,43.224 v1(38.481,43.307)
JTDI: CN1.5 R7.2 U1.38 | length 59.4
  Top Layer w0.254: v1(39.497,39.751) 39.497,30.353 48.641,21.209 57.785,21.209 66.087,12.907 66.406,12.907 66.929,12.384 R7.2 66.929,8.415 66.421,7.907 CN1.5 ; v1(42.545,44.069) 43.934,45.458 45.22,45.458 45.502,45.176 U1.38
  Bottom Layer w0.254: v1(39.497,39.751) 39.497,39.943 39.961,40.408 39.961,41.485 v1(42.545,44.069)
JTDO: CN1.13 R9.2 U1.39 | length 58.3
  Top Layer w0.254: U1.39 44.676,44.676 42.037,42.037 36.449,42.037 35.687,41.275 35.687,31.877 47.879,19.685 54.737,19.685 56.007,18.415 56.007,12.573 R9.2 CN1.13
JTMS: CN1.7 R8.2 U1.34 | length 64.6
  Top Layer w0.254: v1(38.481,41.021) 38.287,40.827 38.287,40.424 38.227,40.364 38.227,30.861 48.387,20.701 55.245,20.701 62.645,13.301 62.645,12.417 R8.2 62.743,8.631 CN1.7 ; v1(46.609,49.911) 46.692,49.828 47.454,49.828 48.796,48.486 U1.34
  Bottom Layer w0.254: v1(38.481,41.021) 38.564,41.104 38.564,41.866 v1(46.609,49.911)
JTREST: CN1.3 R6.2 U1.40 | length 60.9
  Top Layer w0.254: U1.40 44.938,44.176 40.767,40.005 40.767,29.743 48.793,21.717 61.341,21.717 70.116,12.942 70.536,12.942 71.084,12.394 R6.2@71.084,12.244 ; CN1.3 68.961,10.221 70.436,11.696 70.536,11.696 71.059,12.219 R6.2
NetC5_1: C5.1 U1.1 | length 6.9
  Top Layer w0.254: C5.1@47.796,32.097 U1.1 ; C5.1@48.513,32.36 48.717,32.156
NetC6_1: C6.1 U1.23 | length 6.5
  Top Layer w0.254: U1.23 54.821,45.201 55.502,45.201 55.702,45.401 55.702,45.429 58.293,48.021 C6.1@58.293,49.789
NetC9_1: C9.1 U3.10 | length 6.9
  Top Layer w0.254: C9.1 72.771,33.802 75.328,36.36 75.328,36.719 75.501,36.892 U3.10@75.86,36.892
NetC13_2: C13.2 U4.4 | length 6.1
  Top Layer w0.254: U4.4 36.703,6.985 38.481,5.207 40.701,5.207 C13.2
NetC18_1: C18.1 R15.2 U5.1 | length 19.4
  Top Layer w0.254: R15.2 14.097,49.149 16.383,46.863 20.701,46.863 21.497,46.067 21.497,45.239 22.174,44.562 22.174,44.364 22.225,44.313 22.225,38.608 22.92,37.913 U5.1
NetC18_2: C18.2 D1.1 R15.1 U5.16 | length 34.1
  Top Layer w0.254: D1.1 7.596,44.68 7.596,45.428 v1(9.398,47.23) ; v1(12.065,48.387) 12.065,50.287 R15.1 12.197,50.319 16.085,46.431 18.405,46.431 19.128,45.708 19.228,45.708 19.751,45.185 C18.2 19.751,44.985 20.274,44.462 20.374,44.462 21.463,43.373 21.463,36.703 20.574,35.814 19.05,35.814 18.311,36.553 18.311,37.872 18.27,37.913 U5.16
  Bottom Layer w0.254: 9.257,46.849 10.795,48.387 v1(12.065,48.387)
NetC19_1: C19.1 U5.15 | length 14.6
  Top Layer w0.254: v1(16.292,38.261) 16.567,38.261 16.859,38.553 17.897,38.553 U5.15 ; v1(18.308,48.039) 18.583,48.039 18.816,48.272 19.228,48.272 19.751,48.795 C19.1
  Bottom Layer w0.254: v1(16.292,38.261) 16.44,38.409 17.073,38.409 18.308,39.644 v1(18.308,48.039)
NetC21_1: C21.1 C22.2 L3.1 R27.2 | length 8
  Top Layer w0.254: L3.1 27.371,31.689 C22.2 27.371,26.675 R27.2 C21.1
NetC21_2: C21.2 R27.1 R28.2 R30.2 | length 11.4
  Top Layer w0.254: R28.2 R30.2 27.183,21.783 28.78,23.38 28.88,23.38 29.403,23.903 C21.2 R27.1
NetC23_1: C23.1 U1.11 | length 79
  Top Layer w0.254: C23.1 39.216,67.122 39.739,66.599 39.739,66.499 43.307,62.931 v1(43.307,51.689) ; U1.11 52.821,38.651 52.821,37.857 53.086,37.592 55.118,37.592 v1(58.293,34.417)
  Bottom Layer w0.254: v1(43.307,51.689) 40.513,51.689 35.687,46.863 35.687,35.941 45.085,26.543 56.769,26.543 57.785,27.559 57.785,33.76 58.293,34.268 v1(58.293,34.417)
NetC25_1: C25.1 U10.2 | length 10.1
  Top Layer w0.254: C25.1 2.799,6.323 3.322,6.846 3.422,6.846 6.101,9.525 9.525,9.525 10.414,8.636 U10.2
NetC25_2: C25.2 U10.4 | length 4
  Top Layer w0.254: C25.2 4.699,6.323 5.222,6.846 5.322,6.846 6.456,7.98 U10.4
NetC27_2: C27.2 R12.1 R13.2 U1.10 | length 70.4
  Top Layer w0.254: v1(34.671,36.852) 34.163,37.36 34.163,46.101 C27.2@41.77,53.708 ; R13.2 39.484,53.721 R12.1 C27.2@41.77,53.708 ; C27.2 C27.2@41.77,53.708 ; U1.10 52.296,37.62 56.896,33.02 59.182,33.02 v1(59.563,32.639)
  Bottom Layer w0.254: v1(34.671,36.852) 34.754,36.768 34.754,35.858 44.577,26.035 57.277,26.035 58.877,27.635 58.877,31.953 v1(59.563,32.639)
NetC28_1: C28.1 U1.35 | length 6.9
  Top Layer w0.254: C28.1 44.069,48.895 47.371,48.895 48.296,47.97 U1.35 ; C28.1@43.307,49.492 C28.1@43.307,49.582
NetC29_1: C29.1 U1.47 | length 10.3
  Top Layer w0.254: C29.1@43.318,32.12 43.986,32.788 43.986,33.064 45.339,34.417 45.339,40.513 45.502,40.676 U1.47
NetR1_1: R1.1 U1.3 | length 13.9
  Top Layer w0.254: U1.3 48.796,34.515 49.149,34.162 49.149,26.035 49.288,25.896 49.288,25.796 49.811,25.273 R1.1
NetR2_1: R2.1 U1.4 | length 14.7
  Top Layer w0.254: U1.4 49.296,34.676 49.657,34.315 49.657,27.813 51.574,25.896 51.574,25.796 52.097,25.273 R2.1
NetR3_1: R3.1 U1.5 | length 15.2
  Top Layer w0.254: U1.5@49.798,38.479 49.771,38.452 49.771,34.913 50.19,34.493 50.19,29.566 53.86,25.896 53.86,25.796 54.383,25.273 R3.1
NetR4_1: R4.1 U1.6 | length 16.1
  Top Layer w0.254: U1.6 50.296,35.023 50.622,34.696 50.622,31.32 56.146,25.796 56.669,25.273 R4.1
NetR16_2: R16.2 U5.4 | length 4.7
  Top Layer w0.254: U5.4 23.656,39.846 24.416,39.846 25.64,38.622 25.64,38.368 25.781,38.227 25.781,38.139 26.863,37.057 R16.2
NetR17_2: R17.2 U5.13 | length 22.2
  Top Layer w0.254: U5.13 17.924,39.846 18.933,39.846 19.082,39.697 19.082,37.581 19.431,37.232 v1(19.431,36.957) ; R17.2 21.651,52.351 22.174,51.828 22.274,51.828 23.429,50.673 v1(23.495,50.673)
  Bottom Layer w0.254: v1(19.431,36.957) 19.431,42.291 23.495,46.355 v1(23.495,50.673)
NetR18_2: R18.2 U5.12 | length 23.2
  Top Layer w0.254: U5.12 19.685,40.513 20.447,41.275 v1(20.447,41.529) ; R18.2 21.651,56.415 22.174,55.892 22.34,55.892 v1(23.495,54.737)
  Bottom Layer w0.254: v1(20.447,41.529) 20.641,41.723 21.044,41.723 21.104,41.783 21.995,41.783 22.608,41.17 22.882,41.17 24.511,42.799 24.511,53.721 v1(23.495,54.737)
NetR25_1: R25.1 U7.1 U7.5 | length 24.1
  Top Layer w0.254: U7.5 4.826,22.098 6.477,23.749 7.493,23.749 8.509,24.765 8.509,25.223 8.564,25.278 8.564,26.106 U7.1 8.636,26.551 8.81,26.724 9.183,26.724 9.51,27.051 13.186,27.051 13.335,26.902 13.335,26.797 20.481,19.651 21.431,19.651 R25.1
NetR25_2: R25.2 R28.1 U7.2 | length 26.5
  Top Layer w0.254: v1(4.953,23.749) 5.715,24.511 7.09,24.511 7.239,24.66 7.239,25.223 7.294,25.278 7.294,26.106 U7.2 ; v1(10.541,23.495) 15.687,23.495 20.84,18.342 20.84,18.242 21.429,17.653 R28.1 23.849,17.653 R28.1@24.372,17.13
  Bottom Layer w0.254: v1(4.953,23.749) 5.207,23.495 v1(10.541,23.495)
NetR26_1: R26.1 U8.3 U9.1 | length 34.3
  Top Layer w0.254: U9.1 8.382,33.274 7.344,32.236 7.134,32.236 6.985,32.385 5.715,32.385 3.937,30.607 3.937,19.431 5.668,17.7 5.922,17.7 6.096,17.526 U8.3 6.096,15.748 8.189,13.655 R26.1
NetR26_2: R26.2 R29.1 U9.2 | length 31.8
  Top Layer w0.254: U9.2 7.112,35.513 7.286,35.687 7.493,35.687 8.255,36.449 9.884,36.449 11.049,35.284 11.049,32.534 10.541,32.026 v1(10.541,31.877) ; R26.2@16.752,16.078 16.229,15.555 R26.2 16.129,17.584 R29.1 18.161,17.653 v1(18.923,18.415)
  Bottom Layer w0.254: v1(10.541,31.877) 18.923,23.495 v1(18.923,18.415)
NetR29_2: R29.2 U7.6 U7.7 | length 11.1
  Top Layer w0.254: U7.6 U7.7 7.366,20.093 7.54,19.92 7.54,19.892 7.879,19.553 R29.2
NetR31_1: R31.1 R33.1 U9.3 | length 49.1
  Top Layer w0.254: U9.3 5.842,35.583 6.095,35.836 6.167,35.836 v1(7.239,36.908) ; v1(22.987,11.049) 21.463,12.573 R31.1 R33.1 23.849,13.655 24.372,14.178 R33.1@24.372,14.278
  Bottom Layer w0.254: v1(7.239,36.908) 7.339,36.908 7.896,37.465 9.525,37.465 11.557,35.433 11.557,31.623 17.145,26.035 24.003,26.035 24.968,25.07 24.968,13.03 v1(22.987,11.049)
NetR31_2: R31.2 U8.6 U8.7 | length 19
  Top Layer w0.254: U8.6@6.096,11.415 U8.7@7.366,11.415 ; U8.7 7.438,11.597 7.438,10.769 7.493,10.714 7.493,10.541 8.001,10.033 15.941,10.033 20.84,14.932 20.84,15.032 21.363,15.555 R31.2
NetR32_1: R32.1 R34.1 U7.3 | length 31.6
  Top Layer w0.254: U7.3 6.168,26.249 6.168,27.077 6.223,27.132 6.223,27.559 6.477,27.813 13.843,27.813 17.973,23.683 R32.1 21.517,23.737 21.517,24.565 25.273,28.321 25.273,32.573 26.494,33.794 26.594,33.794 27.117,34.317 R34.1
NetR34_2: R34.2 U1.14 | length 56.1
  Top Layer w0.254: R34.2 30.861,36.261 v1(30.861,38.227) ; U1.14 55.59,40.676 60.833,35.433 v1(60.833,33.401)
  Bottom Layer w0.254: v1(30.861,38.227) 43.561,25.527 57.785,25.527 60.833,28.575 v1(60.833,33.401)
NetR35_1: R35.1 R36.2 | length 2.7
  Top Layer w0.254: R35.1 36.068,67.122 R36.2
NetU1_15: U1.15 U8.5 | length 91.3
  Top Layer w0.254: v1(2.921,9.779) 2.936,9.779 4.279,11.122 4.652,11.122 4.826,11.295 U8.5 ; U1.15 56.106,41.176 62.103,35.179 v1(62.103,34.163)
  Bottom Layer w0.254: v1(2.921,9.779) 4.191,8.509 4.521,8.509 8.128,4.902 40.157,4.902 62.103,26.848 v1(62.103,34.163)
NetU3_1: U3.1 USB1.3 | length 20.4
  Top Layer w0.254: USB1.3@78.108,21.717 78.047,21.778 76.419,21.778 74.905,23.292 74.905,29.947 80.899,35.941 80.899,36.252 80.899,36.816 81.072,36.989 U3.1
NetU3_2: U3.2 USB1.2 | length 20.3
  Top Layer w0.254: USB1.2@78.108,21.067 78.543,21.067 78.616,21.14 78.681,21.14 78.753,21.212 79.273,21.212 79.629,21.568 79.629,33.401 82.423,36.195 82.423,37.57 82.274,37.719 82.083,37.719 81.813,37.989 U3.2 ; U3.2@81.36,37.892 U3.2@81.503,37.749
Output: D4.1 L3.2 R35.2 U6.2 | length 50.4
  Top Layer w0.254: U6.2@27.765,62.689 U6.2@28.796,62.689 ; L3.2 29.083,31.977 29.606,32.5 29.706,32.5 32.639,35.433 32.639,61.954 32.49,62.103 29.328,62.103 29.179,62.252 29.179,62.306 U6.2@28.796,62.689 ; 32.8,68.294 32.169,67.663 32.169,66.189 33.911,64.447 33.911,64.373 34.709,63.575 34.783,63.575 34.783,63.561 33.911,62.689 U6.2@28.796,62.689 ; R35.2 33.721,69.215 R35.2@34.163,69.215 ; R35.2@34.16,68.49 34.391,68.722 34.391,68.822
PA2: P1.1 U1.12 | length 45.9
  Top Layer w0.254: v1(53.213,41.021) 53.213,39.424 53.271,39.367 53.271,38.701 U1.12
  Bottom Layer w0.254: v1(53.213,41.021) 60.325,41.021 80.645,61.341 80.645,67.183 P1.1
PA3: P1.3 U1.13 | length 46.2
  Top Layer w0.254: U1.13 55.155,40.176 55.181,40.151 55.181,39.791 56.446,38.526 v1(56.446,38.447) ; P1.3 78.105,67.183 v1(78.105,53.213)
  Bottom Layer w0.254: v1(56.446,38.447) 56.513,38.513 59.595,38.513 74.295,53.213 v1(78.105,53.213)
PA6: P1.5 U1.16 | length 45.2
  Top Layer w0.254: U1.16 56.368,41.676 59.817,38.227 62.357,38.227 75.565,51.435 75.565,66.675 74.553,67.687 74.553,68.195 P1.5
PA7: P1.7 U1.17 | length 40.4
  Top Layer w0.254: U1.17 54.808,42.164 56.642,42.164 57.531,41.275 62.865,41.275 73.025,51.435 73.025,67.183 P1.7
PA8: P1.9 U1.29 | length 47.1
  Top Layer w0.254: U1.29 51.296,52.59 49.911,53.975 49.911,64.389 48.133,66.167 48.133,69.954 49.172,70.993 67.437,70.993 69.015,69.415 69.015,68.653 P1.9
PA11: P1.11 U1.32 | length 42.7
  Top Layer w0.254: v1(49.149,50.927) 49.149,50.673 49.796,50.026 U1.32
  Bottom Layer w0.254: v1(49.149,50.927) 51.943,53.721 51.943,58.242 50.165,60.02 50.165,70.336 50.314,70.485 64.643,70.485 P1.11
PA12: P1.13 U1.33 | length 42.1
  Top Layer w0.254: v1(45.847,66.421) 45.847,52.197 49.296,48.748 U1.33 ; v1(49.149,68.199) 49.149,69.32 50.314,70.485 62.103,70.485 P1.13
  Bottom Layer w0.254: v1(45.847,66.421) 47.371,66.421 v1(49.149,68.199)
PB0: P1.15 U1.18 | length 33.6
  Top Layer w0.254: U1.18 56.892,42.676 57.785,41.783 59.055,41.783 v1(59.817,42.545)
  Bottom Layer w0.254: v1(59.817,42.545) 62.865,45.593 62.865,67.547 61.959,68.453 P1.15
PB1: P1.17 U1.19 | length 30.8
  Top Layer w0.254: U1.19 57.282,43.176 57.512,42.947 58.145,42.947 v1(58.293,42.799)
  Bottom Layer w0.254: v1(58.293,42.799) 60.325,44.831 60.325,67.437 59.309,68.453 P1.17
PB2: P1.19 U1.20 | length 27.8
  Top Layer w0.254: U1.20 56.884,43.676 v1(57.785,44.577)
  Bottom Layer w0.254: P1.19 57.785,67.183 v1(57.785,44.577)
PB5: P1.21 U1.41 | length 33.3
  Top Layer w0.254: U1.41 46.321,43.701 47.003,43.701 47.228,43.926 v1(53.392,43.926)
  Bottom Layer w0.254: v1(53.392,43.926) 53.587,44.12 54.026,44.12 55.245,45.339 55.245,67.183 P1.21
PB6: P1.23 U1.42 | length 43.4
  Top Layer w0.254: v1(42.545,38.989) 42.545,40.767 44.954,43.176 U1.42
  Bottom Layer w0.254: v1(42.545,38.989) 47.117,38.989 52.705,44.577 52.705,67.034 52.61,67.129 52.61,67.278 52.221,67.667 P1.23
PB7: P1.2 U1.43 | length 65.8
  Top Layer w0.254: v1(42.545,36.195) 42.545,36.239 43.561,37.255 43.561,41.021 45.216,42.676 U1.43 ; v1(64.135,37.211) 64.389,37.211 79.375,52.197 P1.2
  Bottom Layer w0.254: v1(42.545,36.195) 42.739,36.389 43.142,36.389 43.202,36.449 63.373,36.449 v1(64.135,37.211)
PB8: P1.4 U1.45 | length 64.4
  Top Layer w0.254: v1(43.815,35.433) 43.815,35.582 44.323,36.09 44.323,41.021 44.978,41.676 U1.45 ; v1(65.913,40.259) 65.996,40.342 66.758,40.342 76.835,50.419 P1.4
  Bottom Layer w0.254: v1(43.815,35.433) 63.881,35.433 65.913,37.465 v1(65.913,40.259)
PB9: P1.6 U1.46 | length 66.8
  Top Layer w0.254: v1(41.783,37.465) 41.589,37.271 41.589,36.868 41.529,36.808 41.529,34.715 41.678,34.566 41.783,34.566 41.932,34.417 44.682,34.417 44.831,34.566 44.831,40.767 45.24,41.176 U1.46 ; v1(62.865,40.259) 74.295,51.689 P1.6
  Bottom Layer w0.254: v1(41.783,37.465) 60.071,37.465 v1(62.865,40.259)
PB10: P1.8 U1.21 | length 29.4
  Top Layer w0.254: U1.21 55.86,44.176 71.755,60.071 P1.8
PB11: P1.10 U1.22 | length 27.7
  Top Layer w0.254: U1.22 55.598,44.676 69.215,58.293 P1.10
PB12: P1.12 U1.25 | length 24.3
  Top Layer w0.254: U1.25 53.321,47.201 53.321,51.035 66.675,64.389 P1.12
PB13: P1.14 U1.26 | length 23.4
  Top Layer w0.254: U1.26 52.796,51.272 64.135,62.611 P1.14
PB14: P1.16 U1.27 | length 22.6
  Top Layer w0.254: U1.27 52.296,51.534 61.595,60.833 P1.16
PB15: P1.18 U1.28 | length 21.7
  Top Layer w0.254: U1.28 51.796,51.796 59.055,59.055 P1.18
PC13: P1.20 U1.2 | length 36
  Top Layer w0.254: U1.2@48.285,38.964 48.285,39.539 48.133,39.691 48.133,41.504 v1(49.682,43.053) ; v1(50.927,57.023) 56.366,57.023 56.515,57.172 P1.20
  Bottom Layer w0.254: v1(49.682,43.053) 49.174,42.545 48.663,42.545 48.514,42.694 48.514,52.324 49.966,53.776 49.966,56.062 v1(50.927,57.023)
QC_EN+: R23.1 U5.6 | length 4.1
  Top Layer w0.254: U5.6 25.923,41.163 25.981,41.221 26.555,41.221 R23.1 26.863,41.561 R23.1@26.34,42.084
QC_EN-: R24.1 U5.8 | length 5.7
  Top Layer w0.254: U5.8 24.683,42.463 25.781,43.561 25.781,44.919 26.863,46.001 R24.1 R24.1@26.809,46.047
RESET: C4.2 CN1.15 R5.2 SW1.1 U1.7 | length 63.3
  Top Layer w0.254: U1.7 50.796,35.208 51.105,34.9 51.105,31.699 56.515,26.289 67.625,26.289 68.338,25.576 68.338,25.476 R5.2@68.861,24.953 ; v1(51.943,10.033) 53.45,8.526 53.45,7.764 CN1.15 ; v1(63.606,21.847) 63.606,21.95 66.609,24.953 R5.2@68.861,24.953 ; SW1.1 69.215,29.201 69.838,28.578 70.038,28.578 71.501,27.115 C4.2 R5.2 R5.2@68.861,24.953
  Bottom Layer w0.254: v1(51.943,10.033) 51.943,11.76 62.03,21.847 v1(63.606,21.847)
RXD: U1.31 U3.8 | length 93.9
  Top Layer w0.254: U1.31@50.294,47.178 50.294,51.306 47.879,53.721 47.879,65.151 46.968,66.062 46.968,70.231 48.746,72.009 79.121,72.009 81.153,69.977 81.153,52.197 76.992,48.036 76.992,39.35 76.835,39.193 76.835,39.138 76.686,38.989 75.958,38.989 U3.8@75.86,38.892
TXD: U1.30 U3.9 | length 96.2
  Top Layer w0.254: U1.30@50.787,47.309 50.787,51.829 49.149,53.467 49.149,64.492 47.625,66.016 47.625,70.231 48.895,71.501 78.867,71.501 80.645,69.723 80.645,52.451 72.263,44.069 72.263,40.005 74.376,37.892 U3.9@75.86,37.892 ; U1.30 U1.30@50.821,47.201
UP_D-: R22.2 U5.10 | length 4.8
  Top Layer w0.254: R22.2 14.031,43.715 14.554,43.192 14.654,43.192 16.033,41.813 U5.10
VBUS: C20.1 C27.1 R11.2 R12.2 U6.1 USB2.A4B9 USB2.B4A9 | length 62.2
  Top Layer w0.254: USB2.B4A9 9.209,52.338 v1(9.5,52.629) ; USB2.A4B9 10.041,57.238 10.307,56.972 v1(10.363,56.972) ; v1(27.765,60.989) 30.597,60.989 30.746,60.84 30.746,60.782 31.269,60.259 v1(31.369,60.259)
  Bottom Layer w0.254: v1(10.363,56.972) 9.5,56.109 v1(9.5,52.629) 9.538,52.667 12.159,52.667 v1(12.197,52.705) 14.834,55.342 23.746,55.342 24.955,54.132 30.096,54.132 30.732,54.769 30.732,59.622 v1(31.369,60.259) 32.387,59.241 32.387,51.848 33.404,50.83 34.719,50.83 v1(39.497,55.608) 39.51,55.621 v1(41.783,55.621)
VBUSmin: C26.1 U2.3 USB1.1 | length 97.6
  Top Layer w0.254: U2.3 20.498,34.214 20.447,34.163 23.561,34.163 C26.1
  Top Layer w0.508: v1(23.495,30.607) 23.495,33.213 23.507,33.225 23.507,33.325 23.903,33.721 C26.1 ; v1(35.179,17.399) 35.687,16.891 43.307,16.891 43.307,7.747 47.879,3.175 73.279,3.175 76.327,6.223 76.327,20.149 76.625,20.447 USB1.1
  Bottom Layer w0.508: v1(23.495,30.607) 25.527,28.575 25.527,22.479 30.607,17.399 v1(35.179,17.399)
Vref: C17.1 R11.1 R14.2 U5.14 | length 21.6
  Top Layer w0.254: C17.1@14.031,41.529 14.031,41.449 R14.2 17.159,39.243 17.189,39.213 U5.14 ; C17.1 14.121,41.449 14.949,41.449 v1(15.403,40.996) ; R11.1 14.217,52.585 14.979,52.585 v1(16.129,51.435)
  Bottom Layer w0.254: v1@15.367,41.021 16.891,42.545 16.891,50.419 16.129,51.181 v1(16.129,51.435)
pads on no net: CN1.11 CN1.17 CN1.19 U2.4 U3.4 U3.5 U3.6 U3.11 U4.2 U5.2 U5.3 U5.11 U9.5 U9.6 U9.7 U10.7 USB1.4 USB2. USB2.A8 USB2.B8

## Polygon pours and split planes (outlines as drawn)
no net on Bottom Layer "NONET_L04_P002" (solid, pour order 2): 0.127,73.66 0,73.533 0,0 83.82,0 83.82,73.533 0.254,73.533
no net on Top Layer "NONET_L01_P000" (solid, pour order 0): 0.127,73.66 0.127,0 83.82,0 83.82,73.66
no net on PWR (split plane): 1.338,0.51 0.51,0.51 0.51,1.338
-5V on PWR (split plane): 6.475,35.506 6.475,1.578 5.407,0.51 1.705,0.51 0.51,1.705 0.51,35.887 1.578,36.955 5.026,36.955
no net on PWR (split plane): 4.182,72.526 2.658,71.002 1.896,70.24 1.866,70.2 1.858,70.181 1.846,70.154 1.84,70.104 1.84,53.848 1.846,53.798 1.858,53.771 1.866,53.752 1.896,53.712 6.885,48.724 4.988,46.828 4.96,46.786 4.951,46.736 4.951,37.213 1.524,37.213 1.474,37.204 1.432,37.176 0.51,36.254 0.51,73.15 4.806,73.15
+5V on PWR (split plane): 7.112,48.576 32.013,48.576 34.923,45.666 34.923,2.173 34.916,2.168 34.886,2.128 34.866,2.082 34.86,2.032 34.861,2.024 33.347,0.51 7.801,0.51 6.733,1.578 6.733,35.56 6.724,35.61 6.696,35.652 5.209,37.138 5.209,46.682 7.104,48.577
no net on PWR (split plane): 43.496,66.468 43.496,54.436 41.012,51.952 38.02,48.96 7.192,48.96 2.224,53.928 2.224,70.024 2.93,70.73 4.454,72.254 5.216,73.016 5.246,73.056 5.266,73.102 5.272,73.15 36.815,73.15
no net on PWR (split plane): 7.434,0.51 5.774,0.51 6.604,1.341
no net on PWR (split plane): 36.302,0.51 33.714,0.51 35.008,1.805
+3V3 on PWR (split plane): 83.31,48.499 83.31,1.793 82.027,0.51 36.845,0.51 35.188,2.168 35.181,2.173 35.181,45.655 35.229,45.661 35.275,45.681 35.315,45.711 38.236,48.632 41.228,51.624 80.184,51.624
no net on PWR (split plane): 35.043,45.983 35.013,45.943 35.012,45.943 32.379,48.576 37.636,48.576
no net on PWR (split plane): 83.31,0.51 82.57,0.51 83.31,1.25
no net on PWR (split plane): 83.31,49.042 80.4,51.952 80.36,51.982 80.341,51.99 80.314,52.002 80.264,52.008 41.612,52.008 43.824,54.22 43.854,54.26 43.862,54.279 43.874,54.306 43.88,54.356 43.88,66.548 43.874,66.598 43.862,66.625 43.854,66.644 43.824,66.684 37.358,73.15 83.31,73.15
GND on GND (split plane): 83.31,0.51 0.51,0.51 0.51,73.15 83.31,73.15

## Other copper
GND (plane layer: these items are gaps in the copper):
  lines w0.254: 0.113,73.341 0.113,0.215 0.328,0 83.541,0 83.947,0.406 83.947,73.279 83.693,73.533 5.08,73.533
PWR (plane layer: these items are gaps in the copper):
  lines w0.254: 0,0 7.112,0 ; 2.54,0 2.032,0 0,2.032 0,35.56 1.524,37.084 5.08,37.084 ; 5.211,0.131 6.604,1.524 ; 5.08,37.084 5.08,46.736 7.112,48.768 ; 5.08,37.084 6.604,35.56 6.604,1.524 ; 6.604,1.524 8.128,0 33.02,0 35.052,2.032 35.052,45.72 32.004,48.768 7.112,48.768 ; 7.112,48.768 7.112,48.768
  lines w0.381: 5.08,73.152 4.318,72.39 2.794,70.866 2.032,70.104 2.032,53.848 7.112,48.768 38.1,48.768 43.688,54.356 43.688,66.548 36.576,73.66 ; 35.052,2.032 37.084,0 81.788,0 83.82,2.032 83.82,48.26 80.264,51.816 41.148,51.816 35.179,45.847

## Silkscreen, mask and mechanical layers (free items; w line width, h text height)
Top Overlay:
  text "FengxueZhang" at 1.27,72.136 h0.76
  text "Portable power supply" at 1.27,70.612 h0.76
  text "Version2" at 1.27,68.834 h0.76
  text "Mar 27, 2022" at 1.27,67.056 h0.76
Mechanical 1:
  lines w0.254: 0,0 84.328,0 84.328,74.168 0,74.168 0,0